# EAGLE board l1b_rev1 (EAGLE 5.02)
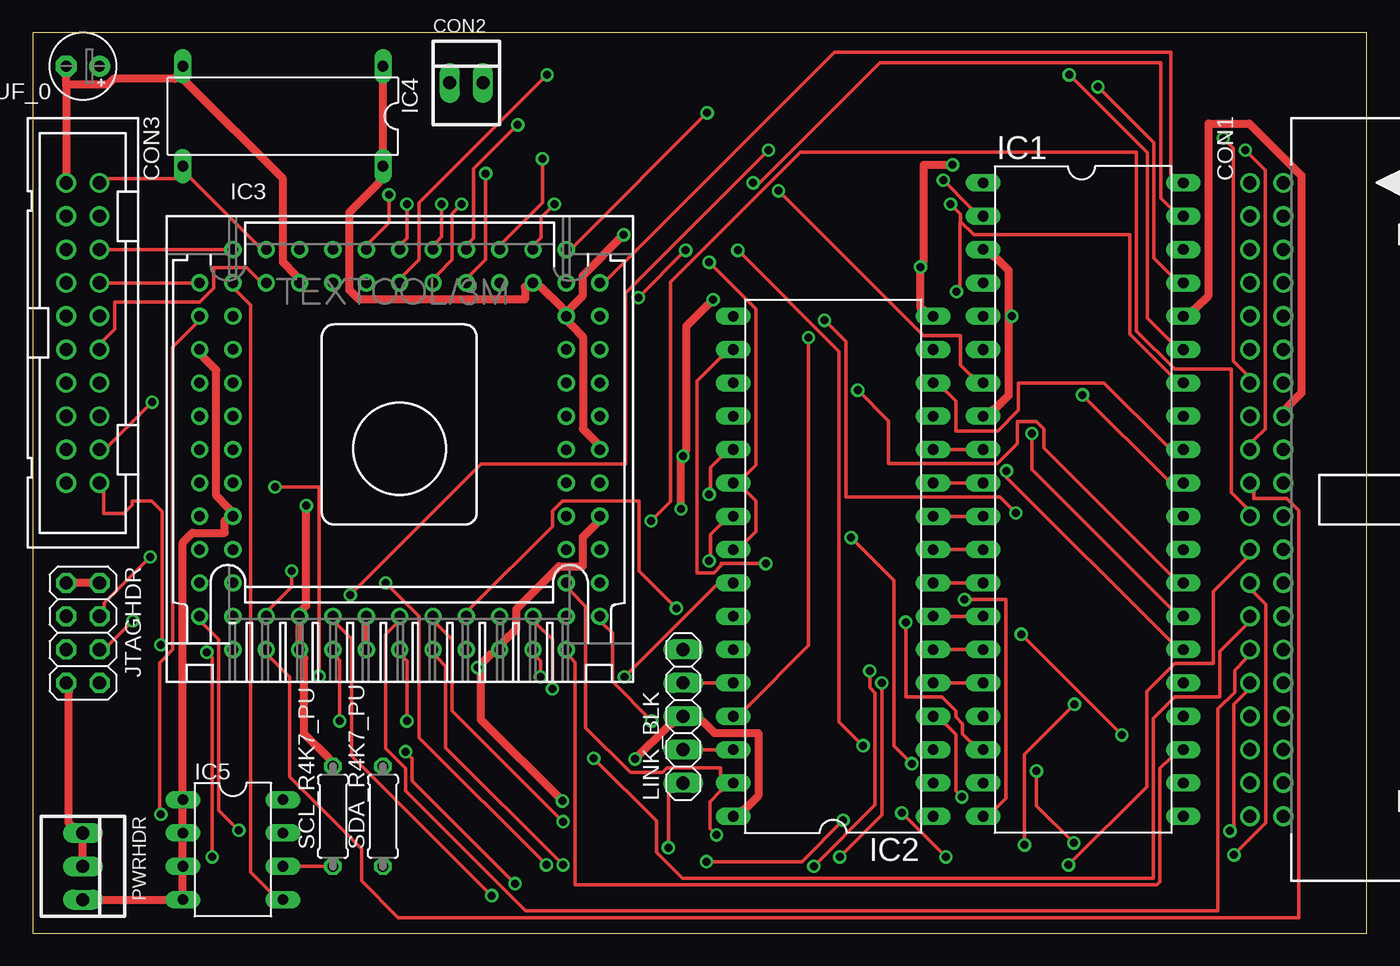
[diagram p0: board, top side]
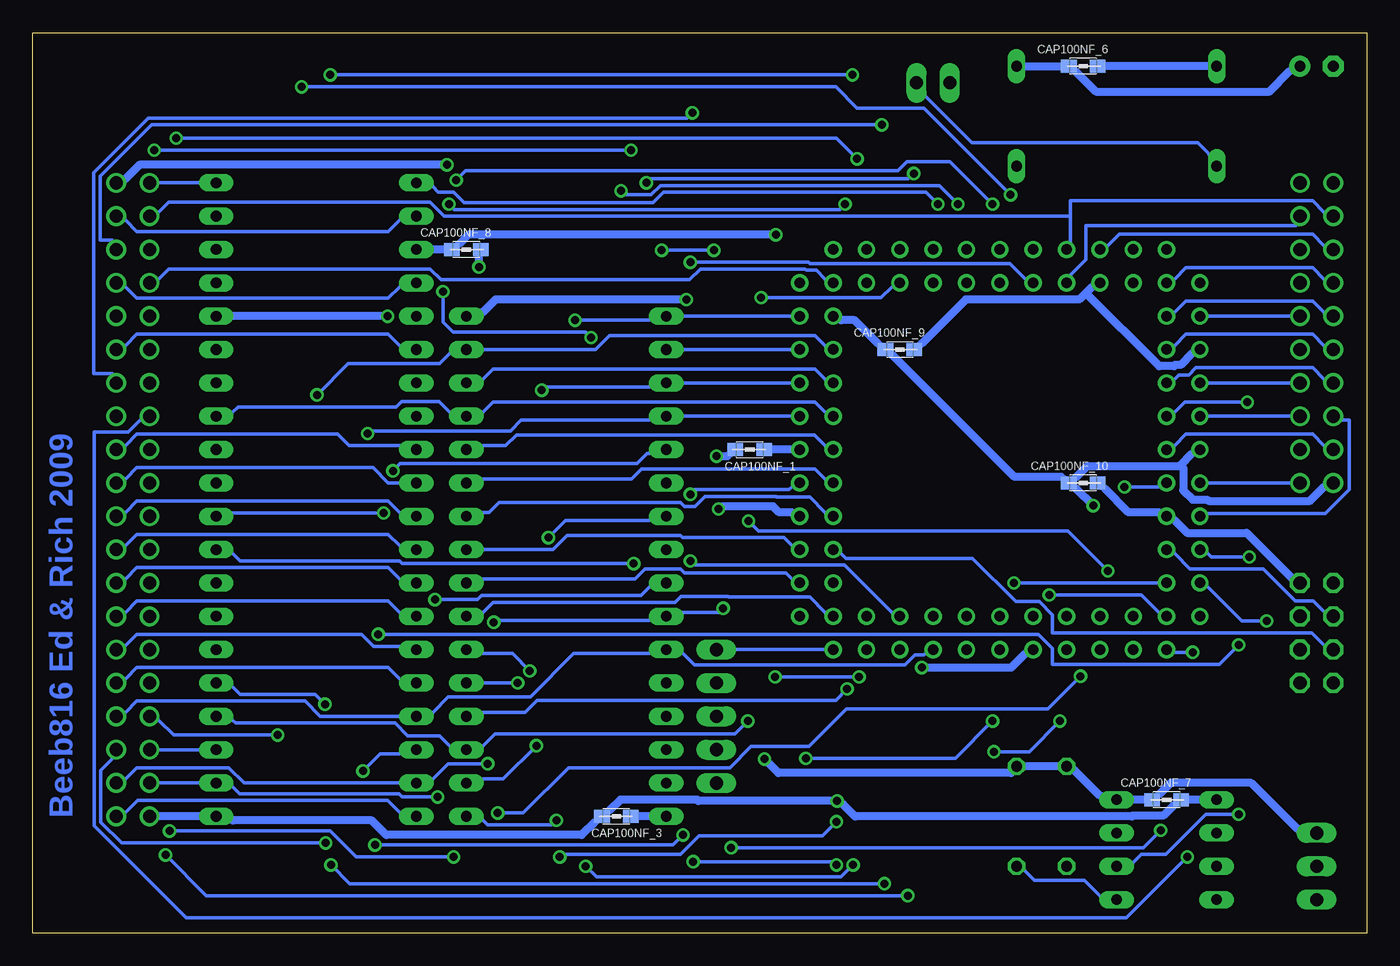
[diagram p1: board, bottom side, seen from below]

Size 101.6 x 68.58 mm. Coordinates in mm from the lower left corner, seen from the top.
Outline: 0,0 101.6,0 101.6,68.58 0,68.58 0,0
Copper layers (1*16): Top 0.035mm / dielectric 1.5mm / Bottom 0.035mm
Design rules "default": minimum track width 10mil, minimum drill 24mil, track to track 8mil, track to pad 8mil, pad to pad 8mil, via to via 8mil, smd to smd 8mil, copper to edge 40mil, drill to drill 8mil, minimum pad ring 10mil, minimum via ring 8mil, stop-mask expansion 4mil, vias tented up to drill 0mil, thermal gap 10mil
Net classes: 0 signal: width 0.203 mm, clearance 0.254 mm; 1 supply: width 0.61 mm, clearance 0.305 mm

## Footprints (pad centres in the part's own frame; a part is rotated, then mirrored left to right if it is on the bottom)
E2,5-5 = drill 0.813 pad 1.6 round: + -1.27,0 | drill 0.813 pad 1.6 octagon: - 1.27,0
0805 = smd 1.2 x 1: 1 -1.1,0; 2 1.1,0
PAK100/2500-5-40 = drill 1 pad 1.422 round: 1 -24.13,-1.27; 2 -24.13,1.27; 3 -21.59,-1.27; 4 -21.59,1.27; 5 -19.05,-1.27; 6 -19.05,1.27; 7 -16.51,-1.27; 8 -16.51,1.27; 9 -13.97,-1.27; 10 -13.97,1.27; 11 -11.43,-1.27; 12 -11.43,1.27; 13 -8.89,-1.27; 14 -8.89,1.27; 15 -6.35,-1.27; 16 -6.35,1.27; 17 -3.81,-1.27; 18 -3.81,1.27; 19 -1.27,-1.27; 20 -1.27,1.27; 21 1.27,-1.27; 22 1.27,1.27; 23 3.81,-1.27; 24 3.81,1.27; 25 6.35,-1.27; 26 6.35,1.27; 27 8.89,-1.27; 28 8.89,1.27; 29 11.43,-1.27; 30 11.43,1.27; 31 13.97,-1.27; 32 13.97,1.27; 33 16.51,-1.27; 34 16.51,1.27; 35 19.05,-1.27; 36 19.05,1.27; 37 21.59,-1.27; 38 21.59,1.27; 39 24.13,-1.27; 40 24.13,1.27
22-23-2021 = drill 1 long: 1 -1.27,0; 2 1.27,0
PAK100/2500-20 = drill 1 pad 1.422 round: 1 -11.43,-1.27; 2 -11.43,1.27; 3 -8.89,-1.27; 4 -8.89,1.27; 5 -6.35,-1.27; 6 -6.35,1.27; 7 -3.81,-1.27; 8 -3.81,1.27; 9 -1.27,-1.27; 10 -1.27,1.27; 11 1.27,-1.27; 12 1.27,1.27; 13 3.81,-1.27; 14 3.81,1.27; 15 6.35,-1.27; 16 6.35,1.27; 17 8.89,-1.27; 18 8.89,1.27; 19 11.43,-1.27; 20 11.43,1.27
DIL40 = drill 0.813 long: 1 -24.13,-7.62; 2 -21.59,-7.62; 3 -19.05,-7.62; 4 -16.51,-7.62; 5 -13.97,-7.62; 6 -11.43,-7.62; 7 -8.89,-7.62; 8 -6.35,-7.62; 9 -3.81,-7.62; 10 -1.27,-7.62; 11 1.27,-7.62; 12 3.81,-7.62; 13 6.35,-7.62; 14 8.89,-7.62; 15 11.43,-7.62; 16 13.97,-7.62; 17 16.51,-7.62; 18 19.05,-7.62; 19 21.59,-7.62; 20 24.13,-7.62; 21 24.13,7.62; 22 21.59,7.62; 23 19.05,7.62; 24 16.51,7.62; 25 13.97,7.62; 26 11.43,7.62; 27 8.89,7.62; 28 6.35,7.62; 29 3.81,7.62; 30 1.27,7.62; 31 -1.27,7.62; 32 -3.81,7.62; 33 -6.35,7.62; 34 -8.89,7.62; 35 -11.43,7.62; 36 -13.97,7.62; 37 -16.51,7.62; 38 -19.05,7.62; 39 -21.59,7.62; 40 -24.13,7.62
DIL32 = drill 0.813 long: 1 -19.05,-7.62; 2 -16.51,-7.62; 3 -13.97,-7.62; 4 -11.43,-7.62; 5 -8.89,-7.62; 6 -6.35,-7.62; 7 -3.81,-7.62; 8 -1.27,-7.62; 9 1.27,-7.62; 10 3.81,-7.62; 11 6.35,-7.62; 12 8.89,-7.62; 13 11.43,-7.62; 14 13.97,-7.62; 15 16.51,-7.62; 16 19.05,-7.62; 17 19.05,7.62; 18 16.51,7.62; 19 13.97,7.62; 20 11.43,7.62; 21 8.89,7.62; 22 6.35,7.62; 23 3.81,7.62; 24 1.27,7.62; 25 -1.27,7.62; 26 -3.81,7.62; 27 -6.35,7.62; 28 -8.89,7.62; 29 -11.43,7.62; 30 -13.97,7.62; 31 -16.51,7.62; 32 -19.05,7.62
284-1273-00-1102JH = drill 0.8 pad 1.27 round: 1 15.24,0; 2 12.7,0; 3 15.24,2.54; 4 12.7,2.54; 5 15.24,5.08; 6 12.7,5.08; 7 15.24,7.62; 8 12.7,7.62; 9 15.24,10.16; 10 12.7,10.16; 11 15.24,12.7; 12 12.7,15.24; 13 12.7,12.7; 14 10.16,15.24; 15 10.16,12.7; 16 7.62,15.24; 17 7.62,12.7; 18 5.08,15.24; 19 5.08,12.7; 20 2.54,15.24; 21 2.54,12.7; 22 0,15.24; 23 0,12.7; 24 -2.54,15.24; 25 -2.54,12.7; 26 -5.08,15.24; 27 -5.08,12.7; 28 -7.62,15.24; 29 -7.62,12.7; 30 -10.16,15.24; 31 -10.16,12.7; 32 -12.7,15.24; 33 -15.24,12.7; 34 -12.7,12.7; 35 -15.24,10.16; 36 -12.7,10.16; 37 -15.24,7.62; 38 -12.7,7.62; 39 -15.24,5.08; 40 -12.7,5.08; 41 -15.24,2.54; 42 -12.7,2.54; 43 -15.24,0; 44 -12.7,0; 45 -15.24,-2.54; 46 -12.7,-2.54; 47 -15.24,-5.08; 48 -12.7,-5.08; 49 -15.24,-7.62; 50 -12.7,-7.62; 51 -15.24,-10.16; 52 -12.7,-10.16; 53 -15.24,-12.7; 54 -12.7,-15.24; 55 -12.7,-12.7; 56 -10.16,-15.24; 57 -10.16,-12.7; 58 -7.62,-15.24; 59 -7.62,-12.7; 60 -5.08,-15.24; 61 -5.08,-12.7; 62 -2.54,-15.24; 63 -2.54,-12.7; 64 0,-15.24; 65 0,-12.7; 66 2.54,-15.24; 67 2.54,-12.7; 68 5.08,-15.24; 69 5.08,-12.7; 70 7.62,-15.24; 71 7.62,-12.7; 72 10.16,-15.24; 73 10.16,-12.7; 74 12.7,-15.24; 75 15.24,-12.7; 76 12.7,-12.7; 77 15.24,-10.16; 78 12.7,-10.16; 79 15.24,-7.62; 80 12.7,-7.62; 81 15.24,-5.08; 82 12.7,-5.08; 83 15.24,-2.54; 84 12.7,-2.54
DIL14/4 = drill 0.813 long: 1 -7.62,-3.81; 7 7.62,-3.81; 8 7.62,3.81; 14 -7.62,3.81
DIL08 = drill 0.813 long: 1 -3.81,-3.81; 2 -1.27,-3.81; 3 1.27,-3.81; 4 3.81,-3.81; 5 3.81,3.81; 6 1.27,3.81; 7 -1.27,3.81; 8 -3.81,3.81
2X04 = drill 1.016 octagon: 1 -3.81,-1.27; 2 -3.81,1.27; 3 -1.27,-1.27; 4 -1.27,1.27; 5 1.27,-1.27; 6 1.27,1.27; 7 3.81,-1.27; 8 3.81,1.27
1X05 = drill 1.016 long: 1 -5.08,0; 2 -2.54,0; 3 0,0; 4 2.54,0; 5 5.08,0
22-23-2031 = drill 1 long: 1 -2.54,0; 2 0,0; 3 2.54,0
0207/7 = drill 0.813 octagon: 1 -3.81,0; 2 3.81,0

## Placement (x,y rotation side)
CAP22UF_0  [E2,5-5]  3.81,66.04 180 top
CAP100NF_1  [0805]  46.99,36.83 0 bottom
CAP100NF_3  [0805]  57.15,8.89 0 bottom
CAP100NF_6  [0805]  21.59,66.04 180 bottom
CAP100NF_7  [0805]  15.24,10.16 180 bottom
CAP100NF_8  [0805]  68.58,52.07 180 bottom
CAP100NF_9  [0805]  35.56,44.45 180 bottom
CAP100NF_10  [0805]  21.59,34.29 180 bottom
CON1  [PAK100/2500-5-40]  93.98,33.02 270 top
CON2  [22-23-2021]  33.02,64.77 0 top
CON3  [PAK100/2500-20]  3.81,45.72 270 top
IC1  [DIL40]  80.01,33.02 270 top
IC2  [DIL32]  60.96,27.94 90 top
IC3  [284-1273-00-1102JH]  27.94,36.83 90 top
IC4  [DIL14/4]  19.05,62.23 180 top
IC5  [DIL08]  15.24,6.35 270 top
JTAGHDR  [2X04]  3.81,22.86 270 top
LINK_BLK  [1X05]  49.53,16.51 90 top
PWRHDR  [22-23-2031]  3.81,5.08 270 top
SCL_R4K7_PU  [0207/7]  22.86,8.89 90 top
SDA_R4K7_PU  [0207/7]  26.67,8.89 90 top

## Library data of the parts
CAP22UF_0 SCL_R4K7_PU SDA_R4K7_PU = resistor
CAP100NF_1 CAP100NF_3 CAP100NF_6-CAP100NF_10 = wuerth-elektronik
CON1 CON3 IC3 = con-3m
CON2 PWRHDR = con-molex
IC1 IC2 IC4 IC5 = ic-package
JTAGHDR LINK_BLK = pinhead

## Nets
A0: CON1.18 IC1.9 IC2.12 IC3.65
A1: CON1.20 IC1.10 IC2.11 IC3.63
A2: CON1.22 IC1.11 IC2.10 IC3.61
A3: CON1.24 IC1.12 IC2.9 IC3.58
A4: CON1.26 IC1.13 IC2.8 IC3.56
A5: CON1.28 IC1.14 IC2.7 IC3.55
A6: CON1.30 IC1.15 IC2.6 IC3.31
A7: CON1.32 IC1.16 IC2.5 IC3.46
A8: CON1.34 IC1.17 IC2.27 IC3.47
A9: CON1.36 IC1.18 IC2.26 IC3.48
A10: CON1.38 IC1.19 IC2.23 IC3.50
A11: CON1.40 IC1.20 IC2.25 IC3.51
A12: CON1.37 IC1.22 IC2.4 IC3.52
A13: CON1.35 IC1.23 IC3.53 LINK_BLK.5
A14: IC1.24 IC2.3 IC3.54
A15: IC1.25 IC2.31 IC3.57
BBC_A14: CON1.33 CON3.20 IC3.24
BBC_A15: CON1.31 IC3.25
BBC_CK8: CON2.2 CON3.2 IC3.9 IC4.8
BBC_D0: CON1.15 IC3.33
BBC_D1: CON1.17 IC3.34
BBC_D2: CON1.19 IC3.35
BBC_D3: CON1.21 IC3.36
BBC_D4: CON1.23 IC3.39
BBC_D5: CON1.25 IC3.40
BBC_D6: CON1.27 IC3.43
BBC_D7: CON1.29 IC3.44
BBC_RDNW: CON1.13 IC3.79
CK0: CON3.9 IC3.15
CK1: CON3.11 IC3.17
CK2: CON3.14 IC3.18
CK3: CON3.13 IC3.19
CK4: CON3.16 IC3.20
CK5: CON3.18 IC3.21
CK6: CON3.17 IC3.23
CPU_A16: IC2.2 IC3.80
CPU_A17: IC3.32 LINK_BLK.1
CPU_A18: IC2.1 IC3.45
CPU_CK_PHI2: IC1.37 IC3.3
CPU_D0: IC1.33 IC2.13 IC3.67
CPU_D1: IC1.32 IC2.14 IC3.69
CPU_D2: IC1.31 IC2.15 IC3.71
CPU_D3: IC1.30 IC2.17 IC3.72
CPU_D4: IC1.29 IC2.18 IC3.70
CPU_D5: IC1.28 IC2.19 IC3.68
CPU_D6: IC1.27 IC2.20 IC3.66
CPU_D7: IC1.26 IC2.21 IC3.62
E: IC1.35 IC3.2
GCK2: CON3.12 IC3.10
GCK3: CON3.8 IC3.12
IRQB: CON1.8 IC1.4
LNK1: IC2.30 LINK_BLK.2
LNK2: IC2.28 LINK_BLK.4
NMIB: CON1.12 IC1.6
P6: CON3.4 IC3.6
P7: CON3.5 IC3.7
P11: CON3.6 IC3.11
P26: CON3.15 IC3.26
PHI0: CON1.7 IC3.76
PHI1: CON1.6 IC3.81
PHI2: CON1.3 CON3.3 IC3.5
RAM_CEB: IC2.22 IC2.24 IC3.4
RDNW: IC1.34 IC2.29 IC3.77
RDY: CON1.4 IC1.2 IC3.1
RSTB: CON1.1 IC1.40 IC3.74
SCL: CON3.10 IC3.14 IC5.6 SCL_R4K7_PU.1
SDA: CON3.7 IC3.13 IC5.5 SDA_R4K7_PU.1
SYNC: CON1.14 IC3.75
TCK: IC3.30 JTAGHDR.6
TDI: IC3.28 JTAGHDR.4
TDO: IC3.59 JTAGHDR.5
TMS: IC3.29 JTAGHDR.3
VDA: IC1.39 IC3.82
VDD [supply]: CAP22UF_0.+ CAP100NF_1.2 CAP100NF_3.2 CAP100NF_6.2 CAP100NF_7.2 CAP100NF_8.2 CAP100NF_9.2 CAP100NF_10.2 CON1.16 CON3.19 IC1.3 IC1.8 IC1.36 IC2.32 IC3.22 IC3.37 IC3.38 IC3.64 IC3.73 IC3.78 IC4.1 IC4.14 IC5.8 JTAGHDR.7 LINK_BLK.3 PWRHDR.1 PWRHDR.2 SCL_R4K7_PU.2 SDA_R4K7_PU.2
VPA: IC1.7 IC3.83
VPB: IC1.1 IC3.84
VSS [supply]: CAP22UF_0.- CAP100NF_1.1 CAP100NF_3.1 CAP100NF_6.1 CAP100NF_7.1 CAP100NF_8.1 CAP100NF_9.1 CAP100NF_10.1 CON1.2 CON1.39 CON3.1 IC1.21 IC2.16 IC3.8 IC3.16 IC3.27 IC3.41 IC3.42 IC3.49 IC3.60 IC4.7 IC5.1 IC5.2 IC5.3 IC5.4 JTAGHDR.1 JTAGHDR.2 PWRHDR.3

## Tracks (layer width: path | path; a pad name or v marks a point on that pad's centre or on a via)
A0
  Top 0.254: IC2.12 IC1.9
  Bottom 0.254: IC3.65 41.25,37.13 42.06,37.95 64.77,37.95 65.58,37.13 67.31,37.13 IC2.12 | CON1.18 94.54,37.13 93.67,38 78.38,38 77.52,37.13 73.66,37.13 IC1.9
A1
  Top 0.254: IC2.11 IC1.10
  Bottom 0.254: IC3.63 41.25,34.59 42.01,35.36 55.22,35.36 55.98,34.59 67.31,34.59 IC2.11 | CON1.20 94.54,34.59 93.67,35.46 75.69,35.46 74.52,34.29 IC1.10
A2
  Top 0.254: IC2.10 IC1.11
  Bottom 0.254: IC3.61 41.25,32.05 42.42,33.22 44.96,33.22 45.01,33.27 50.39,33.27 51.16,32.51 51.97,32.51 52.27,32.82 66.09,32.82 66.85,32.05 67.31,32.05 IC2.10 | CON1.22 94.54,32.05 93.67,32.92 74.52,32.92 73.66,32.05 IC1.11
A3
  Top 0.254: IC2.9 IC1.12
  Bottom 0.254: IC3.58 43.79,29.52 44.4,30.12 52.12,30.12 52.27,30.28 60.91,30.28 61.98,29.21 IC2.9 | CON1.24 94.54,29.52 93.67,30.38 74.52,30.38 73.66,29.52 IC1.12
A4
  Top 0.254: IC2.8 IC1.13
  Bottom 0.254: IC3.56 43.79,26.98 44.25,27.43 51.97,27.43 52.27,27.74 54.97,27.74 55.73,26.98 67.31,26.98 IC2.8 | CON1.26 94.54,26.98 93.67,27.84 74.52,27.84 73.66,26.98 IC1.13
A5
  Top 0.254: IC2.7 IC1.14
  Bottom 0.254: IC3.55 41.25,24.43 42.42,25.6 48.62,25.6 48.67,25.65 52.22,25.65 52.68,25.2 66.55,25.2 67.31,24.43 IC2.7 | CON1.28 94.54,24.43 93.67,25.3 74.52,25.3 73.66,24.43 IC1.14
A6  (via drill 0.61)
  Top 0.254: v26.87,26.67 29.41,24.13 29.41,14.88 v39.12,5.18 | v59.49,5.08 64.16,9.75 64.16,18.29 63.75,18.69 v63.75,19.96 | IC2.6 IC1.15
  Bottom 0.254: v39.12,5.18 40.03,4.27 58.67,4.27 v59.49,5.08 | v63.75,19.96 65.08,21.29 67.31,21.29 IC2.6 | IC3.31 v26.87,26.67 | CON1.30 94.54,21.89 93.67,22.76 76.56,22.76 75.64,21.84 73.66,21.84 IC1.15
A7  (via drill 0.61)
  Top 0.254: v40.39,8.48 31.95,16.92 31.95,22.35 30.79,23.52 IC3.46 | v61.47,5.79 64.67,8.99 v64.67,19.05 | IC2.5 IC1.16
  Bottom 0.254: v40.39,8.48 41.45,7.42 50.85,7.42 52.27,5.99 61.27,5.99 v61.47,5.79 | v64.67,19.05 IC2.5 | CON1.32 94.54,19.36 93.67,20.22 74.52,20.22 73.66,19.36 IC1.16
A8
  Bottom 0.254: IC3.47 33.63,21.29 33.73,21.18 34.39,21.18 35.15,20.42 51.21,20.42 52.07,21.29 IC2.27 54.61,21.29 60.4,21.29 63.7,17.98 69.95,17.98 71.12,16.82 IC1.17 79.7,16.51 80.87,17.68 93.67,17.68 94.54,16.82 CON1.34
A9  (via drill 0.61)
  Top 0.254: v49.02,24.74 46.18,27.58 46.18,32.92 40.34,32.92 39.57,32.16 39.57,30.99 33.33,24.74 IC3.48 | v66.5,23.67 66.5,17.98 69.24,17.98 70.31,16.92 70.31,16.46 70.81,15.95 70.81,15.19 71.42,14.58 IC1.18 | v79.3,6.86 76.45,9.7 v76.45,12.34
  Bottom 0.254: v49.02,24.74 49.33,24.43 52.07,24.43 IC2.26 54.61,23.82 66.34,23.82 v66.5,23.67 | v79.3,6.86 94.84,6.86 96.42,8.43 96.42,12.39 95.56,13.26 CON1.36 | v76.45,12.34 75.13,13.66 73.66,13.66 IC1.18
A10  (via drill 0.61)
  Top 0.254: v51.51,28.35 51.61,28.45 51.61,30.38 52.38,31.14 IC2.23 | v66.95,12.9 65.58,14.28 65.58,26.87 v62.33,30.12
  Bottom 0.254: CON1.38 94.54,11.73 93.67,12.6 86.67,12.6 85.5,11.43 IC1.19 71.12,11.73 69.95,12.9 v66.95,12.9 | v51.51,28.35 51.21,28.04 39.78,28.04 36.17,24.43 IC3.50 | v62.33,30.12 61.01,31.45 54.61,31.45 IC2.23
A11  (via drill 0.61)
  Top 0.254: v38.66,19.51 38.66,20.73 38.41,20.98 IC3.51 | v45.06,19.51 52.07,26.52 IC2.25 | v70.97,25.4 74.12,25.4 74.12,10.26 73.36,9.5 IC1.20
  Bottom 0.254: v38.66,19.51 v45.06,19.51 | IC1.20 73.66,9.2 74.57,10.11 93.62,10.11 94.54,9.2 CON1.40 | v70.97,25.4 67.72,25.4 67.41,25.7 55.27,25.7 54.61,26.36 IC2.25
A12  (via drill 0.61)
  Top 0.254: v39.57,18.59 39.57,22.35 38.41,23.52 IC3.52 | v70.76,10.36 70.31,10.82 70.31,15.14 69.55,15.9 IC2.4
  Bottom 0.254: CON1.37 IC1.22 86.36,11.12 85.85,10.62 73.71,10.62 73.46,10.36 v70.76,10.36 | v39.57,18.59 40.44,17.73 63.2,17.73 64.11,16.82 67.31,16.82 IC2.4
A13
  Top 0.254: IC1.23 86.67,13.36 85.85,12.55 85.85,3.91 85.6,3.66 41.3,3.66 41.3,20.62 40.95,20.98 IC3.53
  Bottom 0.254: IC1.23 CON1.35 | IC3.53 LINK_BLK.5
A14  (via drill 0.61)
  Top 0.254: v47.14,16.15 44.15,19.15 44.15,22.86 43.48,23.52 IC3.54
  Bottom 0.254: v47.14,16.15 48.11,15.19 66.4,15.19 67.31,14.28 IC2.3 69.85,14.28 70.61,15.04 73.05,15.04 74.02,16 86.16,16 86.36,16.2 IC1.24
A15  (via drill 0.61)
  Top 0.254: IC3.57 40.95,26.06 42.11,24.89 42.11,15.65 45.52,12.24 47.95,12.24 48.31,12.6 52.38,12.6 52.38,12.04 IC2.31 52.38,10.82 51.56,10.01 51.56,7.98 v52.07,7.47 | v79.35,17.42 75.54,13.61 v75.54,6.71
  Bottom 0.254: v79.35,17.42 80.11,18.19 85.8,18.19 86.36,18.75 IC1.25 | v75.54,6.71 52.83,6.71 v52.07,7.47
BBC_A14  (via drill 0.61)
  Top 0.254: v75.29,22.76 v82.96,15.09 | v9.75,21.95 9.86,22.05 9.86,32.11 9.04,32.92 7.57,32.92 7.57,32.61 6.91,31.95 5.38,31.95 5.38,33.58 CON3.20
  Bottom 0.254: CON3.20 IC3.24 | v82.96,15.09 90.88,15.09 92,16.2 CON1.33 | v75.29,22.76 24.99,22.76 23.93,21.69 23.93,20.47 11.23,20.47 v9.75,21.95
BBC_A15  (via drill 0.61)
  Top 0.254: v18.44,33.98 21.79,33.98 v21.79,19.56 | v66.19,9.14 v69.55,5.79 | v91.19,7.77 91.49,8.08 91.49,17.42 92.41,18.34 CON1.31
  Bottom 0.254: v18.44,33.98 15.85,33.98 IC3.25 | v21.79,19.56 24.28,17.07 39.62,17.07 42.47,14.22 46.89,14.22 48.51,12.6 60.81,12.6 64.26,9.14 v66.19,9.14 | v69.55,5.79 76.96,5.79 78.94,7.77 v91.19,7.77
BBC_CK8
  Top 0.254: IC3.9 17.17,52.38 12.04,57.51 IC4.8 10.82,57.45 5.79,57.45 CON3.2
  Bottom 0.254: CON2.2 33.58,63.7 30.07,60.2 12.85,60.2 12.04,59.38 IC4.8
BBC_D0  (via drill 0.61)
  Top 0.254: v13.26,21.39 13.66,20.98 v13.66,5.79
  Bottom 0.254: v13.26,21.39 14.63,21.39 IC3.33 | v13.66,5.79 18.29,1.17 89.92,1.17 96.93,8.18 96.93,38.15 94.34,38.15 93.42,39.06 CON1.15
BBC_D1  (via drill 0.61)
  Top 0.254: v24.18,25.76 34.14,35.71 45.16,35.71 45.16,48.77 v56.03,59.64 | v92.35,59.64 93.88,58.12 93.88,38.41 93.02,37.54 CON1.17
  Bottom 0.254: v24.18,25.76 17.17,25.76 15.85,24.43 IC3.34 | v56.03,59.64 v92.35,59.64
BBC_D2
  Top 0.254: IC3.35 18.09,20.98 19.56,19.51 19.56,11.89 25.04,6.4 25.04,3.96 27.84,1.17 96.42,1.17 96.42,32.21 95.5,33.12 93.02,33.12 93.02,33.58 CON1.19
BBC_D3  (via drill 0.61)
  Top 0.254: v19.71,27.58 19.71,26.36 18.09,24.74 IC3.36 | v47.09,31.39 48.56,32.87 48.56,49.58 58.47,59.49 84.07,59.49 84.07,45.87 86.97,42.98 91.29,42.98 91.29,33.58 92.41,32.46 CON1.21
  Bottom 0.254: v19.71,27.58 22.76,30.63 46.33,30.63 v47.09,31.39
BBC_D4  (via drill 0.61)
  Top 0.254: v23.37,16.15 23.37,20.78 23.16,20.98 IC3.39 | v28.4,13.82 28.91,13.31 28.91,11.58 v36.73,3.76 | v78.89,5.18 84.84,11.12 84.84,18.39 86.97,20.52 89.92,20.52 89.92,26.01 92.41,28.5 CON1.23
  Bottom 0.254: v23.37,16.15 25.7,13.82 v28.4,13.82 | v36.73,3.76 77.47,3.76 v78.89,5.18
BBC_D5  (via drill 0.61)
  Top 0.254: v34.95,2.85 24.28,13.51 24.28,22.4 23.16,23.52 IC3.40 | v91.49,5.94 93.93,8.38 93.93,25.04 93.02,25.96 CON1.25
  Bottom 0.254: v34.95,2.85 88.39,2.85 v91.49,5.94
BBC_D6  (via drill 0.61)
  Top 0.254: v28.5,16.15 28.5,20.73 28.25,20.98 IC3.43 | v42.72,13.31 47.5,8.53 47.5,6.15 49.48,4.17 85.34,4.17 85.34,16.36 86.97,17.98 90.42,17.98 90.42,21.44 92.41,23.42 CON1.27
  Bottom 0.254: v28.5,16.15 31.34,13.31 v42.72,13.31
BBC_D7
  Top 0.254: IC3.44 27.64,23.52 26.87,22.76 26.87,14.07 28.4,12.55 28.4,10.82 37.54,1.68 90.27,1.68 90.27,17.07 91.54,18.34 91.54,20.02 92.41,20.88 CON1.29
BBC_RDNW  (via drill 0.61)
  Top 0.254: v38.81,58.98 38.81,55.63 35.87,52.68 IC3.79 | v90.68,60.55 91.44,59.79 91.44,43.59 92.41,42.62 CON1.13
  Bottom 0.254: v38.81,58.98 40.39,60.55 v90.68,60.55
CK0
  Bottom 0.254: IC3.15 14.63,47.3 13.77,48.16 4.12,48.16 3.25,47.3 CON3.9
CK1
  Bottom 0.254: IC3.17 14.63,44.76 13.77,45.62 4.12,45.62 3.25,44.76 CON3.11
CK2
  Bottom 0.254: CON3.14 IC3.18
CK3
  Bottom 0.254: IC3.19 14.63,42.22 14.33,42.52 13.56,42.52 13.01,43.08 4.12,43.08 3.25,42.22 CON3.13
CK4
  Bottom 0.254: CON3.16 IC3.20
CK5  (via drill 0.61)
  Top 0.254: v9.09,40.44 5.79,37.13 CON3.18
  Bottom 0.254: v9.09,40.44 13.87,40.44 14.63,39.67 IC3.21
CK6
  Bottom 0.254: IC3.23 14.63,37.13 13.77,38 4.12,38 3.25,37.13 CON3.17
CPU_A16  (via drill 0.61)
  Top 0.254: v49.73,52.02 v46.13,48.41 | v53.7,52.02 61.42,44.3 61.42,16.1 v63.25,14.28
  Bottom 0.254: v46.13,48.41 36.98,48.41 36.17,49.23 IC3.80 | v53.7,52.02 v49.73,52.02 | v63.25,14.28 65.79,11.73 67.31,11.73 IC2.2
CPU_A17  (via drill 0.61)
  Top 0.254: v15.7,7.82 14.17,9.35 14.17,22.35 13.01,23.52 IC3.32 | v48.41,6.5 48.41,10.72 LINK_BLK.1
  Bottom 0.254: v15.7,7.82 17.02,6.5 v48.41,6.5
CPU_A18  (via drill 0.61)
  Top 0.254: v40.39,5.18 31.45,14.12 31.45,20.32 30.79,20.98 IC3.45 | v51.31,5.44 58.57,5.44 v61.72,8.59
  Bottom 0.254: v40.39,5.18 40.64,5.44 v51.31,5.44 | v61.72,8.59 62.08,8.23 66.95,8.23 67.31,8.59 IC2.1
CPU_CK_PHI2  (via drill 0.61)
  Top 0.254: v27.13,56.24 27.13,54.1 25.7,52.68 IC3.3 | v81.13,64.47 85.39,60.2 85.39,51.41 86.67,50.14 IC1.37
  Bottom 0.254: v27.13,56.24 33.73,62.84 38.81,62.84 40.44,64.47 v81.13,64.47
CPU_D0
  Bottom 0.254: IC3.67 41.25,39.67 42.01,40.44 66.55,40.44 67.31,39.67 IC2.13 69.85,39.67 70.66,40.49 73.51,40.49 73.91,40.08 85.95,40.08 86.36,39.67 IC1.33
CPU_D1
  Top 0.254: IC1.32 86.36,37.13 81.58,41.91 75.08,41.91 75.08,39.83 73.51,38.25 70.31,38.25 70.31,40.54 69.55,41.3 IC2.14
  Bottom 0.254: IC3.69 41.25,42.22 42.01,42.98 66.55,42.98 67.31,42.22 IC2.14
CPU_D2  (via drill 0.61)
  Top 0.254: v79.96,41 86.36,34.59 IC1.31
  Bottom 0.254: IC3.71 41.25,44.76 42.01,45.52 57.66,45.52 58.73,44.45 IC2.15 69.85,44.15 70.61,43.38 77.57,43.38 v79.96,41
CPU_D3  (via drill 0.61)
  Top 0.254: v74.88,32 73.66,33.22 61.92,33.22 61.92,45.06 v60.3,46.69
  Bottom 0.254: IC3.72 IC2.17 54.61,46.69 v60.3,46.69 | v74.88,32 86.36,32 IC1.30
CPU_D4  (via drill 0.61)
  Top 0.254: v55.83,28.14 52.43,28.14 52.43,27.99 51.87,27.43 50.6,27.43 50.6,42.06 52.38,43.84 IC2.18
  Bottom 0.254: IC2.18 IC3.70 | v55.83,28.14 73.46,28.14 73.66,28.35 85.8,28.35 86.36,28.91 IC1.29
CPU_D5  (via drill 0.61)
  Top 0.254: v62.84,41.35 65.18,39.01 65.18,35.76 73.46,35.76 74.98,37.29 74.98,38.96 76.45,38.96 77.01,38.41 77.01,36.93 86.67,27.28 IC1.28
  Bottom 0.254: IC3.68 IC2.19 54.61,41.6 62.59,41.6 v62.84,41.35
CPU_D6  (via drill 0.61)
  Top 0.254: v76.1,38.05 76.1,35.31 86.67,24.74 IC1.27
  Bottom 0.254: IC3.66 IC2.20 54.61,39.06 64.41,39.06 65.23,38.25 75.89,38.25 v76.1,38.05
CPU_D7  (via drill 0.61)
  Top 0.254: v51.51,33.43 51.61,33.53 51.61,35.46 52.38,36.22 IC2.21 | v74.17,35.2 74.17,34.7 86.67,22.2 IC1.26
  Bottom 0.254: v51.51,33.43 51.16,33.78 43.99,33.78 43.79,33.98 IC3.62 | v74.17,35.2 73.61,35.76 55.58,35.76 54.81,36.52 54.61,36.52 IC2.21
E  (via drill 0.61)
  Top 0.254: v39.17,65.38 29.41,55.63 29.41,51.31 28.25,50.14 IC3.2 | v78.94,65.38 84.89,59.44 84.89,46.84 86.67,45.06 IC1.35
  Bottom 0.254: v39.17,65.38 v78.94,65.38
GCK2
  Top 0.254: IC3.10 17.17,49.84 16.31,50.7 13.77,50.7 13.77,49.12 12.7,48.06 6.25,48.06 6.25,46.02 5.38,45.16 CON3.12
GCK3
  Top 0.254: CON3.8 IC3.12
IRQB
  Bottom 0.254: IC1.4 73.66,49.23 74.52,48.36 93.67,48.36 94.54,49.23 CON1.8
LNK1
  Top 0.254: LINK_BLK.2 IC2.30
LNK2
  Top 0.254: LINK_BLK.4 IC2.28
NMIB
  Bottom 0.254: IC1.6 73.66,44.76 74.52,45.62 93.67,45.62 94.54,44.76 CON1.12
P6
  Bottom 0.254: IC3.6 22.55,50.14 21.39,51.31 21.39,53.9 5.38,53.9 CON3.4
P7
  Bottom 0.254: IC3.7 19.71,52.38 18.85,53.24 4.12,53.24 3.25,52.38 CON3.5
P11
  Top 0.254: CON3.6 IC3.11
P26
  Bottom 0.254: IC3.26 12.09,31.95 3.15,31.95 1.32,33.78 1.32,39.06 1.83,39.06 CON3.15
PHI0
  Bottom 0.254: IC3.76 41.25,49.84 41.91,50.49 42.67,50.49 42.77,50.6 50.75,50.6 51.56,49.78 70.51,49.78 71.32,50.6 91.24,50.6 92,49.84 CON1.7
PHI1  (via drill 0.61)
  Top 0.254: v36.93,61.57 33.58,58.22 33.58,52.93 33.33,52.68 IC3.81
  Bottom 0.254: v36.93,61.57 92.56,61.57 96.47,57.66 96.47,52.78 95.56,52.78 CON1.6
PHI2
  Bottom 0.254: 22.55,54.61 22.55,55.78 4.12,55.78 3.25,54.91 CON3.3 | 22.55,54.61 22.55,52.68 IC3.5 | CON1.3 92,54.91 91.24,55.68 71.32,55.68 70.26,54.61 22.55,54.61
RAM_CEB  (via drill 0.61)
  Top 0.254: v51.51,51.1 55.07,47.55 55.07,35.66 54.3,34.9 IC2.22 54.3,33.68 55.07,32.92 55.07,30.58 54.3,29.82 IC2.24
  Bottom 0.254: v51.51,51.1 42.52,51.1 42.42,51 27.18,51 26.01,49.84 IC3.4
RDNW  (via drill 0.61)
  Top 0.254: v39.73,55.52 38.71,54.51 38.71,52.98 38.41,52.68 IC3.77 | v69.9,55.52 70.66,54.76 70.66,54.2 | 70.66,54.2 71.68,53.19 83.57,53.19 83.57,45.62 86.67,42.52 IC1.34 | v59.08,45.36 59.08,21.89 54.3,17.12 IC2.29 | v70.36,48.87 70.61,49.12 70.61,54.1 70.66,54.2
  Bottom 0.254: v39.73,55.52 40.13,55.12 69.49,55.12 v69.9,55.52 | v59.08,45.36 59.49,45.77 69.6,45.77 70.36,46.53 v70.36,48.87
RDY  (via drill 0.61)
  Top 0.254: v28.5,55.52 28.5,52.93 28.25,52.68 IC3.1 | v69.34,57.35 71.42,55.27 71.42,55.22 IC1.2
  Bottom 0.254: v28.5,55.52 31.75,58.78 35,58.78 35.71,58.06 68.63,58.06 v69.34,57.35 | CON1.4 94.54,54.3 93.67,53.44 74.52,53.44 73.66,54.3 IC1.2
RSTB
  Top 0.254: IC3.74 43.79,49.84 61.06,67.11 86.67,67.11 86.67,57.76 IC1.40
  Bottom 0.254: IC1.40 CON1.1
SCL  (via drill 0.61)
  Top 0.254: IC5.6 SCL_R4K7_PU.1 | v9.75,9.04 9.65,9.14 9.65,20.57 10.67,21.59 10.67,44.65 12.39,46.38 IC3.14
  Bottom 0.254: IC3.14 CON3.10 | v9.75,9.04 12.24,9.04 15.29,5.99 17.17,5.99 17.78,5.38 IC5.6
SDA
  Top 0.254: IC5.5 18.09,3.15 16.61,4.62 16.61,47.85 15.54,48.92 IC3.13
  Bottom 0.254: IC5.5 20.32,2.85 21.49,4.01 25.3,4.01 26.06,4.78 SDA_R4K7_PU.1 | IC3.13 14.63,49.84 13.77,50.7 4.12,50.7 3.25,49.84 CON3.7
SYNC  (via drill 0.61)
  Top 0.254: v51.36,62.48 41.25,52.38 IC3.75
  Bottom 0.254: v51.36,62.48 51.77,62.08 92.81,62.08 96.98,57.91 96.98,42.62 95.56,42.62 CON1.14
TCK  (via drill 0.61)
  Top 0.254: v7.62,23.77 5.79,21.95 JTAGHDR.6
  Bottom 0.254: v7.62,23.77 9.5,23.77 12.09,26.36 IC3.30
TDI  (via drill 0.61)
  Top 0.254: v8.94,28.65 5.44,25.15 5.44,24.84 JTAGHDR.4
  Bottom 0.254: v8.94,28.65 11.84,28.65 12.09,28.91 IC3.28
TDO
  Bottom 0.254: IC3.59 40.03,28.91 39.67,28.55 30.02,28.55 26.72,25.25 24.94,25.25 23.93,24.23 23.93,22.86 4.17,22.86 3.25,21.95 JTAGHDR.5
TMS
  Bottom 0.254: IC3.29 14.63,28.91 13.46,27.74 7.87,27.74 5.44,25.3 4.06,25.3 3.25,24.49 JTAGHDR.3
VDA  (via drill 0.61)
  Top 0.254: v34.49,57.86 34.49,51.31 33.33,50.14 IC3.82 | v54.86,57.15 55.37,57.15 64.52,66.29 85.9,66.29 85.9,55.98 86.67,55.22 IC1.39
  Bottom 0.254: v34.49,57.86 34.9,57.45 54.56,57.45 v54.86,57.15
VDD  (via drill 0.61)
  Top 0.61: PWRHDR.2 PWRHDR.1 2.74,8.33 2.74,18.34 JTAGHDR.7 | IC2.32 54.3,9.5 55.27,10.46 55.27,15.24 51.92,15.24 51,16.15 LINK_BLK.3 48.41,15.8 v45.87,13.26 | SCL_R4K7_PU.2 22.55,13.31 20.68,15.19 20.68,20.93 20.62,20.98 IC3.37 IC3.38 20.62,24.74 20.83,24.94 v20.83,32.56 | 74.32,46.99 74.32,50.49 73.36,51.46 IC1.3 | 74.32,46.99 74.32,40.95 73.36,39.98 IC1.8 | 74.32,46.99 v74.57,46.99 | CON1.16 95.56,40.08 96.62,41.15 96.62,57.71 92.66,61.67 89.56,61.67 89.56,48.56 88.59,47.6 IC1.36 | IC4.1 IC4.14 26.36,57.15 24.13,54.91 24.13,48.97 24.84,48.26 37.49,48.26 37.49,49.23 IC3.78 38.71,49.23 40.34,47.6 IC3.73 | IC3.64 42.88,37.44 41.91,38.41 41.91,45.41 40.95,46.38 IC3.73 | v45.01,53.19 41.91,50.09 41.91,48.56 40.95,47.6 IC3.73
  Bottom 0.61: IC2.32 CAP100NF_3.2 | v45.87,13.26 44.81,12.19 27.08,12.19 SDA_R4K7_PU.2 SCL_R4K7_PU.2 22.25,12.39 20.32,10.46 IC5.8 CAP100NF_7.2 15.75,10.62 14.94,11.43 8.79,11.43 5.28,7.92 PWRHDR.1 | IC1.3 CAP100NF_8.2 69.09,52.53 68.43,53.19 v45.01,53.19 | v74.57,46.99 IC1.36 | IC4.1 CAP100NF_6.2 22.1,65.58 20.62,64.11 7.42,64.11 5.84,65.68 CAP22UF_0.+ | IC3.64 CAP100NF_1.2 | IC3.73 40.03,46.69 39.01,46.69 37.24,44.91 CAP100NF_9.2 36.07,43.99 26.82,34.75 23.27,34.75 CAP100NF_10.2 | 14.17,35.66 13.31,36.52 IC3.22 | 14.17,35.66 14.28,35.56 21.29,35.56 22.1,34.75 CAP100NF_10.2 | CON3.19 3.25,33.98 4.32,32.92 12.04,32.92 12.14,33.02 13.26,33.02 13.97,33.73 13.97,35.46 14.17,35.66 | v20.83,32.56 22.1,33.83 CAP100NF_10.2
VPA  (via drill 0.61)
  Top 0.254: v31.14,55.52 31.14,53.03 30.79,52.68 IC3.83 | v56.79,56.54 67.82,45.52 70.66,45.52 70.66,43.28 71.42,42.52 IC1.7
  Bottom 0.254: v31.14,55.52 32.56,56.95 53.8,56.95 54.51,56.24 56.49,56.24 v56.79,56.54
VPB  (via drill 0.61)
  Top 0.254: v32.66,55.52 31.95,54.81 31.95,51.31 30.79,50.14 IC3.84
  Bottom 0.254: v32.66,55.52 33.58,56.44 53.54,56.44 54.36,55.63 68.73,55.63 69.55,56.44 70.71,56.44 71.12,56.84 IC1.1
VSS  (via drill 0.61)
  Top 0.61: 2.54,64.62 CON3.1 | 2.54,64.62 CAP22UF_0.- | 2.54,64.62 5.69,64.62 6.15,65.08 10.82,65.08 IC4.7 11.73,64.77 19.05,57.45 19.05,51.1 20.02,50.14 IC3.8 | PWRHDR.3 IC5.4 IC5.3 IC5.2 IC5.1 11.43,29.77 12.14,30.48 14.63,30.48 14.63,31.45 IC3.27 14.94,32.36 13.97,33.33 13.97,42.88 13.01,43.84 IC3.16 | JTAGHDR.2 JTAGHDR.1 | IC2.16 67.61,47.6 v67.61,50.75 67.87,51.21 67.87,58.52 v70.05,58.52 | IC3.41 IC3.42 | v49.38,32.31 49.38,36.17 v49.53,36.32 49.78,36.78 49.78,46.23 v51.82,48.26 | IC3.60 42.88,31.14 41.91,30.18 41.91,27.94 40.08,27.94 36.83,24.69 36.83,23.16 35.87,22.2 IC3.49 34.95,21.29 v33.88,20.22 34.14,19.76 34.14,16.26 v40.34,10.06
  Bottom 0.61: IC4.7 CAP100NF_6.1 | 21.39,48.77 20.93,49.23 IC3.8 | 21.39,48.77 21.89,48.26 30.53,48.26 33.88,44.91 CAP100NF_9.1 | IC3.16 13.31,44.15 14.17,43.28 14.58,43.28 14.68,43.18 15.8,43.18 21.39,48.77 | IC5.1 CAP100NF_7.1 14.73,9.7 15.49,8.94 17.83,8.94 17.88,8.89 38.96,8.89 39.88,9.8 v40.34,10.06 50.9,10.06 51,10.16 56.84,10.16 57.66,9.35 CAP100NF_3.1 58.83,8.43 59.79,7.47 74.68,7.47 75.79,8.59 86.36,8.59 IC1.21 CON1.39 | CAP100NF_10.1 19.91,33.83 18.14,32.05 15.85,32.05 IC3.27 14.63,31.45 13.66,30.48 9.14,30.48 5.74,27.08 JTAGHDR.2 | v67.61,50.75 67.61,51.61 CAP100NF_8.1 | v70.05,58.52 93.47,58.52 94.54,57.45 CON1.2 | v49.53,36.32 48.72,36.32 48.67,36.37 CAP100NF_1.1 | v49.38,32.31 49.17,32.51 45.21,32.51 44.76,32.05 43.79,32.05 IC3.60 | v33.88,20.22 27.08,20.22 26.01,21.29 IC3.41 | v51.82,48.26 66.34,48.26 67.31,47.3 IC2.16

## Text on the board
Bottom: Beeb816 Ed & Rich 2009